# Altium PCB RFID.PCBDOC
Units mm, origin at the board's own origin, x right, y up, seen from the top; angles counter-clockwise.
Board outline 78.02 x 56.38 mm, 2 copper layers (Top Layer, Bottom Layer); 43 components, 46 nets, 207 pads, 109 vias.
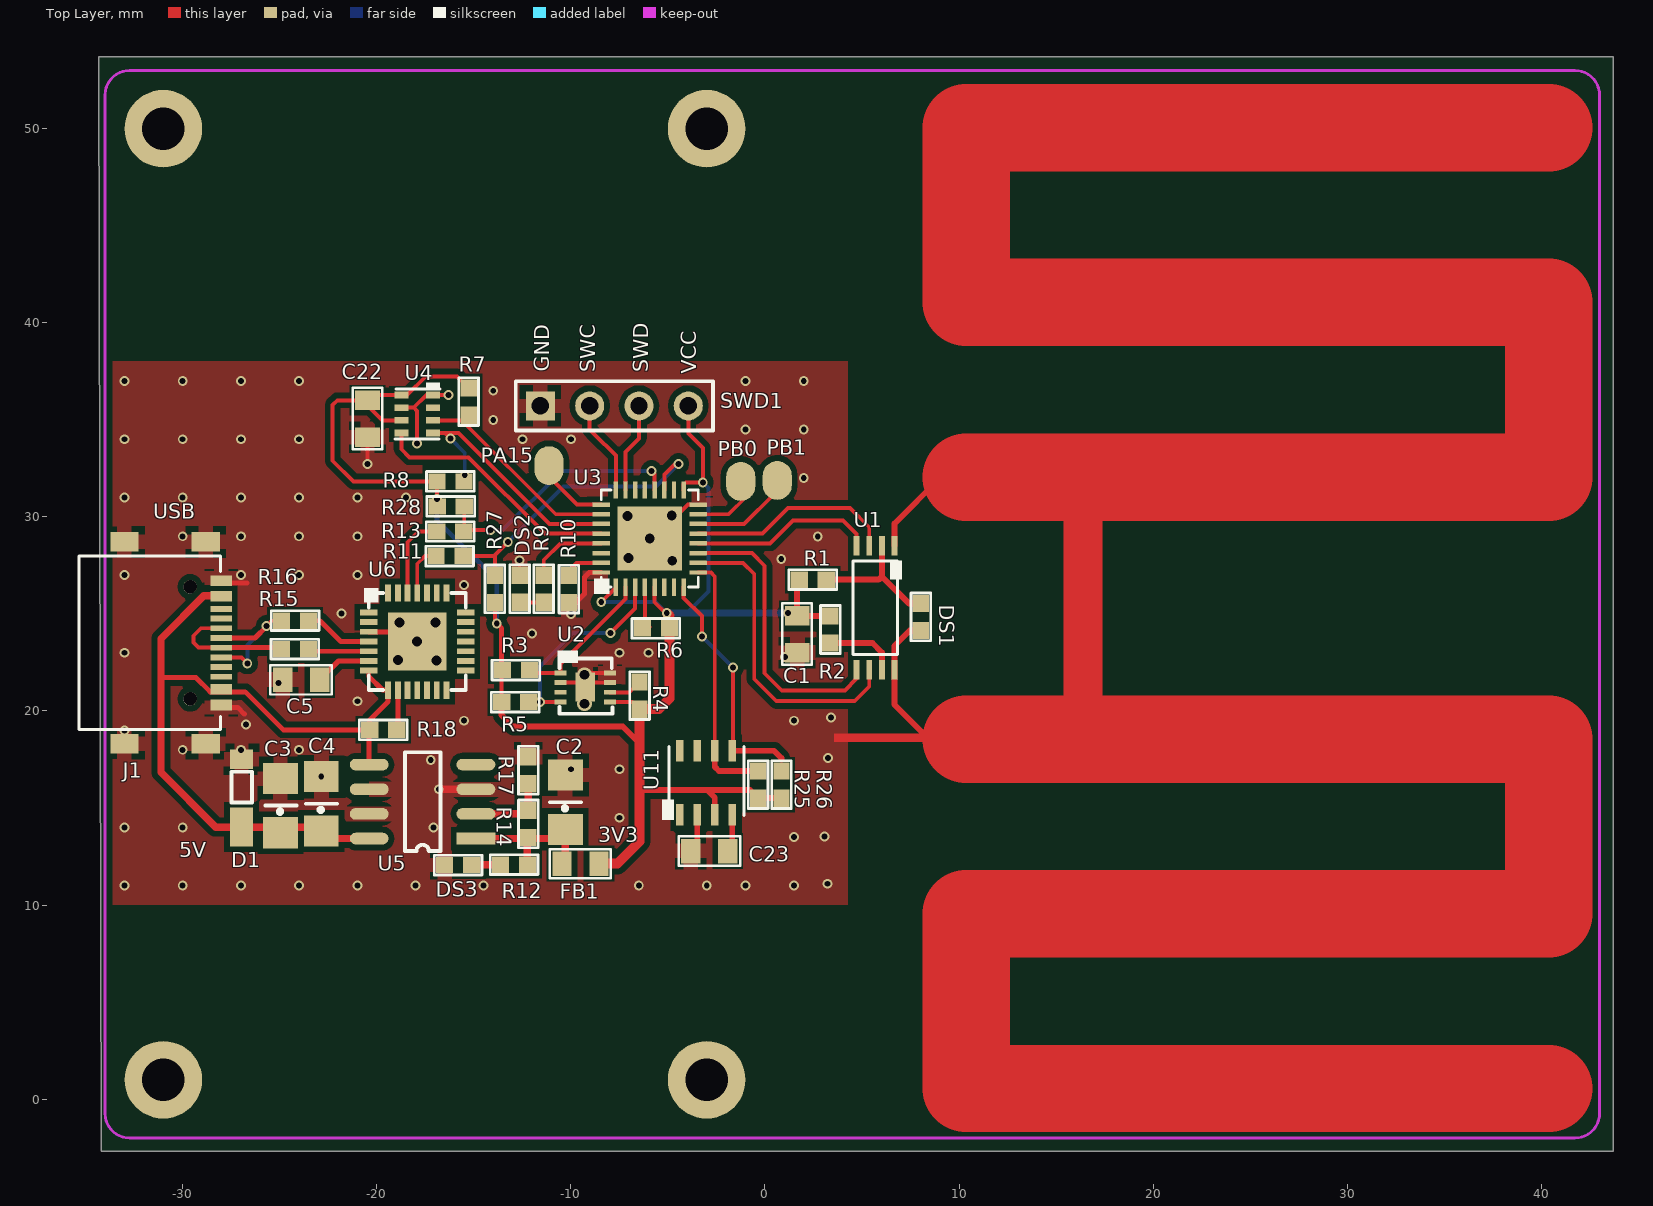
[diagram p0: Top Layer view]
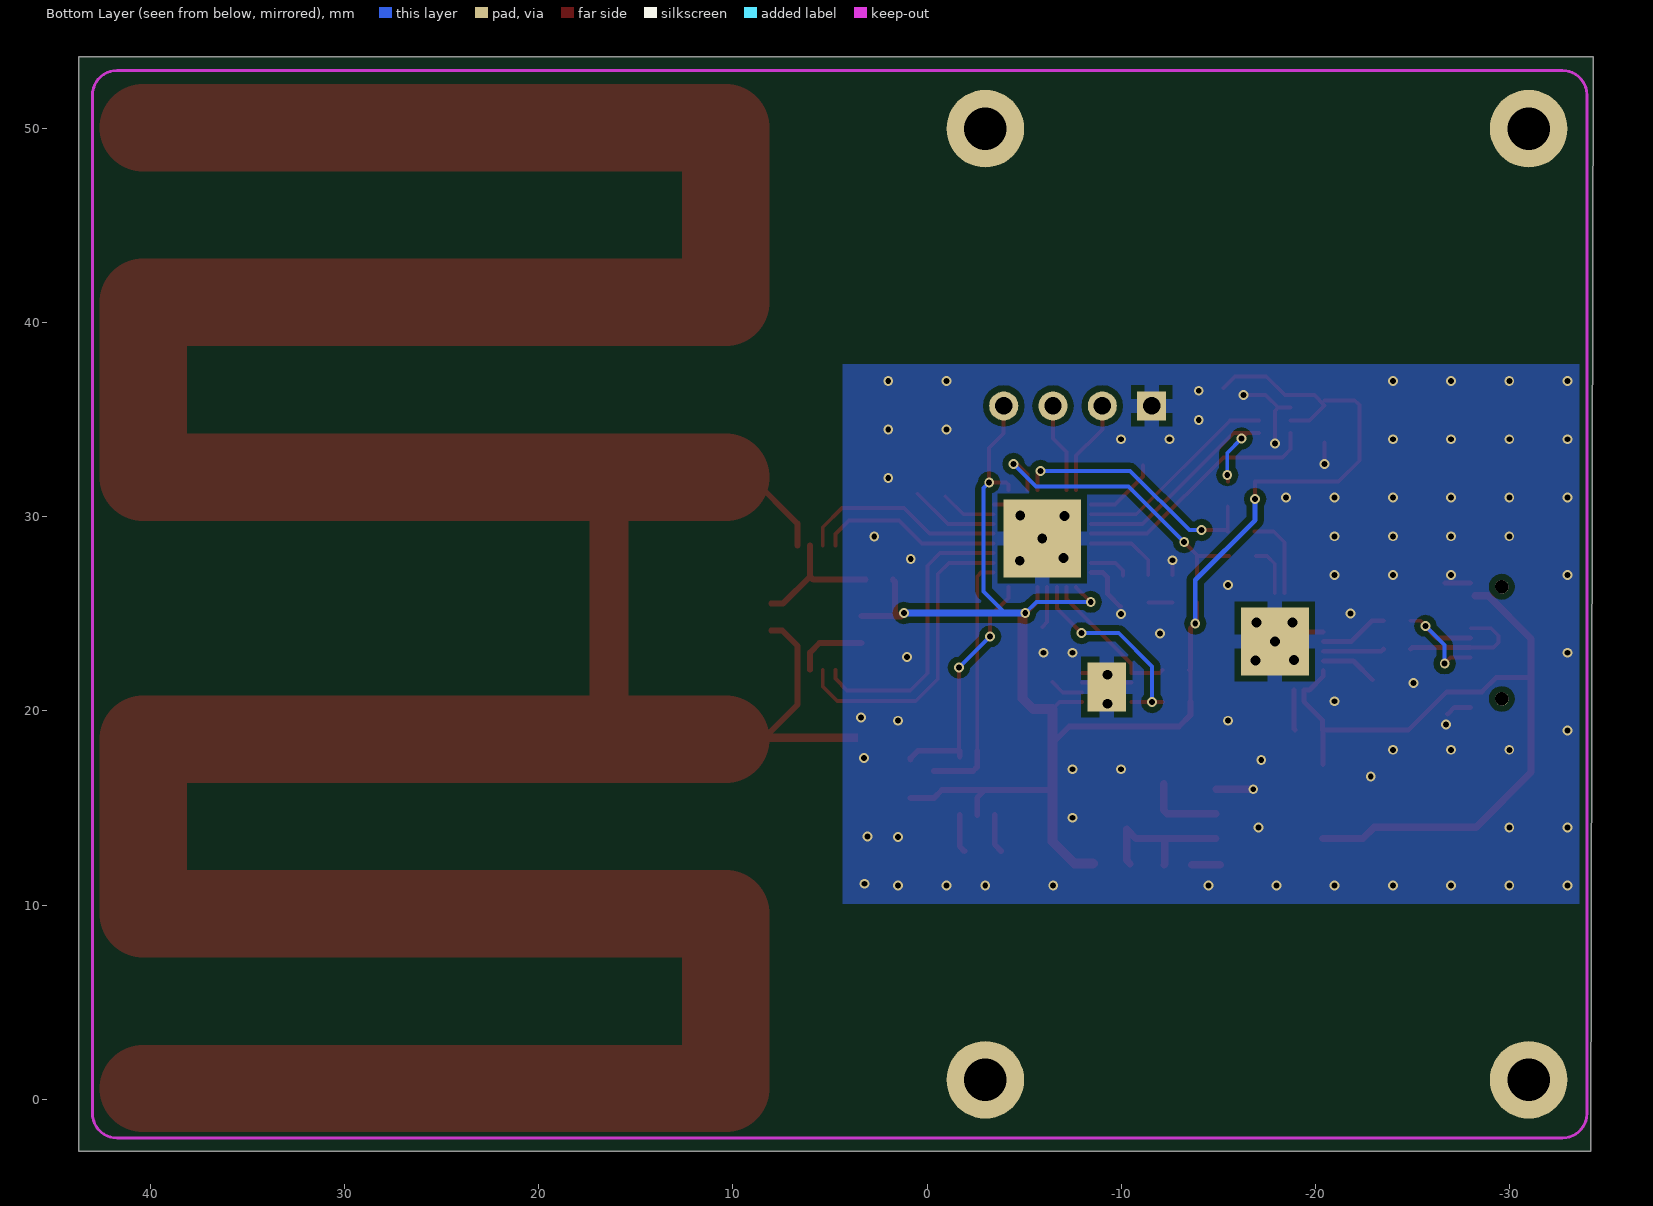
[diagram p1: Bottom Layer view, seen from below]

## Layer stack, top to bottom
Top Layer: signal copper 0.0356
Dielectric: dielectric 0.32, FR-4, Dk 4.8
Bottom Layer: signal copper 0.0356

## Board outline
-34.32,53.701 43.699,53.701 43.699,-2.676 -34.187,-2.676

## Design rules (kind name [scope] priority, off if disabled: settings)
Clearance [All] p1: gap=0.178
ComponentClearance [All] p1: gap=0.254 collisioncheckmode=0
PolygonConnect [All] p1: connectstyle=Relief reliefconductorwidth=0.762 reliefentries=4 polygonreliefangle="90 Angle"
RoutingVias [All] p1: holewidth=0.305 width=0.508 viastyle="Through Hole" minholewidth=0.305 minwidth=0.508 maxholewidth=25.4 maxwidth=25.4
SolderMaskExpansion [All] p1: expansion=0.102
TestPointUsage [All] p1: valid=0 allowmultiple=FALSE
Testpoint [All] p1: side=15 testpointundercomponent=TRUE minsize=1.016 maxsize=2.54 preferedsize=1.524 minholesize=0 maxholesize=1.016 preferedholesize=0.813 testpointgrid=0.025 style=1023 order=-539222988
Width [All] p1: maxlimit=25.4 minlimit=0.203 preferedwidth=0.254 toplayer_prefwidth=0.508 bottomlayer_prefwidth=0.203 minimp=50.000000 maximp=50.000000 favimp=50.000000
17 further rules are at their usual default settings.

## Components (designator, comment, footprint, x,y, rotation, side; value= is the part's Value field where it differs from the comment)
C1 "0.1uF" 0805 1.657,22.994 r90 top
C2 "10uF" 1206 -10.282,15.301 r90 top
C3 "10uF" 1206 -24.958,15.126 r90 top
C4 "10uF" 1206 -22.862,15.219 r90 top
C5 "1uF" 0805 -22.943,21.609 r180 top
C22 "0.1uF" 0805 -20.479,34.099 r90 top
C23 "0.1uF" 0805 -3.826,12.781 r0 top
D1 "NC" DFLS240L -26.965,17.514 r270 top
DS1 "LED" 0603 8.028,24.831 r270 top
DS2 "LED" 0603 -12.64,26.308 r90 top
DS3 "LED" 0603 -15.822,12.063 r180 top
FB1 "Inductor" 0805 -8.553,12.136 r180 top
J1 "USB_TYPEC" USB_TYPEC_16 -28.014,26.837 r270 top
R1 "0" 0603 2.473,26.768 r0 top
R2 "0" 0603 3.372,24.185 r270 top
R3 "2K" 0603 -12.82,22.109 r0 top
R4 "2K" 0603 -6.46,20.781 r270 top
R5 "2K" 0603 -12.854,20.461 r0 top
R6 "10K" 0603 -5.629,24.257 r180 top
R7 "2K" 0603 -15.262,35.927 r270 top
R8 "2K" 0603 -16.192,31.826 r0 top
R9 "2K" 0603 -11.399,26.309 r90 top
R10 "0" 0603 -10.107,26.296 r90 top
R11 "10" 0603 -16.262,27.98 r180 top
R12 "2K" 0603 -12.913,12.081 r0 top
R13 "10" 0603 -16.229,29.249 r180 top
R14 "10K" 0603 -12.187,14.174 r270 top
R15 "10" 0603 -24.205,23.189 r0 top
R16 "10" 0603 -24.197,24.652 r0 top
R17 "3.1K" 0603 -12.187,16.931 r270 top
R18 "10K" 0603 -19.654,19.03 r0 top
R25 "10k" 0603 -0.346,16.194 r270 top
R26 "10k" 0603 0.852,16.194 r270 top
R27 "10k" 0603 -13.912,26.306 r90 top
R28 "10k" 0603 -16.178,30.543 r0 top
SWD1 "Header 4" HDR1X4 -11.57,35.718 r0 top
U1 "EM4325" EM4325 6.674,22.123 r270 top
U2 "SHT30_DIS" SHT30 -10.536,21.974 r0 top
U3 "STM32L432KBU6" STM32L432KBU6 -8.436,26.385 r90 top
U4 "SPL06-001" SPL06-001 -18.728,36.275 r0 top
U5 "LT1963" AT24C64 -14.89,13.428 r180 top
U6 "CP2102" CP2102 -17.908,23.563 r0 top
U11 "WF183DE-15BAR" WF183D -4.387,17.951 r90 top

## Footprints (in the part's own frame and the unit in brackets; to place one, negate y for a bottom-side part, rotate by r counter-clockwise, add the part's x,y. Pads: shape width x height; smd on the part's side, far side on the other; paste and mask are expansions set on the pad)
0603 [mil]
  rect 35x33 smd: 1(-28,-0.1) 2(27,-0.1)
  silkscreen extent -49,-20 48,20
0805 [mm]
  rect 1x1.27 smd: 1(0,0) 2(1.905,0)
  silkscreen extent -0.62,-0.75 2.55,0.76
1206 [mm]
  rect 1.6x1.8 smd: 1(-1.4,0) 2(1.4,0)
  silkscreen extent -0.4,-0.81 0,0.79
AT24C64 [mm]
  rect 2x0.6 smd: 1(0,0)
  oval 2x0.6 smd: 2(0,-1.27) 3(0,-2.54) 4(0,-3.81) 5(5.5,-3.81) 6(5.5,-2.54) 7(5.5,-1.27) 8(5.5,0)
  silkscreen extent 1.84,-4.44 3.66,0.64
CP2102 [mm]
  rect 3.5x3.5 smd far side: 0(-0.012,0.013)
  rect 3x3 smd: 0(-0.006,0.016)
  rect 0.9x0.3 smd: 1(-2.506,1.516) 2(-2.506,1.016) 3(-2.506,0.516) 4(-2.506,0.016) 5(-2.506,-0.484) 6(-2.506,-0.984) 7(-2.506,-1.484) 15(2.494,-1.484) 16(2.494,-0.984) 17(2.494,-0.484) 18(2.494,0.016) 19(2.494,0.516) 20(2.494,1.016) 21(2.494,1.516)
  rect 0.3x0.9 smd: 8(-1.506,-2.484) 9(-1.006,-2.484) 10(-0.506,-2.484) 11(-0.006,-2.484) 12(0.494,-2.484) 13(0.994,-2.484) 14(1.494,-2.484) 22(1.494,2.516) 23(0.994,2.516) 24(0.494,2.516) 25(-0.006,2.516) 26(-0.506,2.516) 27(-1.006,2.516) 28(-1.506,2.516)
  silkscreen extent -2.76,-2.48 2.49,2.77
DFLS240L [mm]
  rect 1x1.2 smd: 1(-0.003,-0.003)
  rect 2x1.2 smd: 2(3.497,-0.003)
  silkscreen extent 0.64,-0.53 2.24,0.54
EM4325 [mm]
  rect 1x0.3 smd: 1(-6.4,0) 2(-6.4,-0.65) 3(-6.4,-1.3) 4(-6.4,-1.95) 5(0,-1.95) 6(0,-1.3) 7(0,-0.65) 8(0,0)
  silkscreen extent -5.64,-2.13 -0.79,0.38
HDR1X4 [mm]
  rect 1.5x1.5 hole 0.9: 1(0,0)
  round 1.5 hole 0.9: 2(2.54,0) 3(5.08,0) 4(7.62,0)
  silkscreen extent -1.27,-1.27 8.89,1.27
SHT30 [mm]
  rect 0.6x0.25 smd: 1(0.002,-0.012) 2(0.002,-0.512) 3(0.002,-1.012) 4(0.002,-1.512) 5(2.552,-1.512) 6(2.552,-1.012) 7(2.552,-0.512) 8(2.552,-0.012)
  rect 1x1.5 smd: 9(1.275,-0.738)
  rect 2x2.5 smd far side: 9(1.275,-0.738)
  silkscreen extent -0.16,-2.12 2.67,1.14
SPL06-001 [mm]
  rect 0.7x0.35 smd: 1(1.625,0) 2(1.625,-0.65) 3(1.625,-1.3) 4(1.625,-1.95) 5(0,-1.95) 6(0,-1.3) 7(0,-0.65) 8(0,0)
  silkscreen extent -0.33,-2.26 1.98,0.64
STM32L432KBU6 [mm]
  rect 0.9x0.23 smd: 1(0,-0.75) 2(0,-1.25) 3(0,-1.75) 4(0,-2.25) 5(0,-2.75) 6(0,-3.25) 7(0,-3.75) 8(0,-4.25) 17(5,-4.25) 18(5,-3.75) 19(5,-3.25) 20(5,-2.75) 21(5,-2.25) 22(5,-1.75) 23(5,-1.25) 24(5,-0.75)
  rect 0.23x0.9 smd: 9(0.75,-5) 10(1.25,-5) 11(1.75,-5) 12(2.25,-5) 13(2.75,-5) 14(3.25,-5) 15(3.75,-5) 16(4.25,-5) 25(4.25,0) 26(3.75,0) 27(3.25,0) 28(2.75,0) 29(2.25,0) 30(1.75,0) 31(1.25,0) 32(0.75,0)
  rect 3.3x3.3 smd: 33(2.5,-2.5)
  rect 4x4 smd far side: 33(2.5,-2.5)
  silkscreen extent -0.36,-5 5,0.38
USB_TYPEC_16 [mm]
  round 0.7 hole 0.7: 1(0.435,-1.6) 2(6.215,-1.6)
  rect 1x1.45 smd: 3(-1.875,-0.8) 4(8.525,-0.8) 5(-1.875,-4.98) 6(8.525,-4.98)
  rect 0.3x1.1 smd: A1(0,0) A4(0.8,0) A5(2.075,0) A6(3.075,0) A7(3.575,0) A8(4.575,0) A9(5.85,0) A12(6.65,0) B1(6.4,0) B4(5.6,0) B5(5.075,0) B6(4.075,0) B7(2.575,0) B8(1.575,0) B9(1.05,0) B12(0.25,0)
  silkscreen extent -1.15,-7.33 7.8,-0.03
WF183D [mm]
  rect 1.1x0.4 smd: 1(-3.3,0) 2(-3.3,-0.9) 3(-3.3,-1.8) 4(-3.3,-2.7) 5(0,-2.7) 6(0,-1.8) 7(0,-0.9) 8(0,0)
  silkscreen extent -3.56,-3.3 0.23,0.91

## Part data
C1 C22 C23: library part Cap, "Capacitor"
C2 C3 C4 C5: library part "Cap Pol1", "Polarized Capacitor (Radial)"
D1: library part Diode, "Default Diode"
DS1 DS2 DS3: "Typical BLUE SiC LED"
R1 R2 R3 R4 R5 R6 R7 R8 R9 R10 R11 R12 R13 R14 R15 R16 R17 R25 R26 R27 R28: library part Res2, "Resistor"
R18: library part Res, "Resistor"
SWD1: "Header, 4-Pin"
U2: library part SHT30
U5: library part LT1763
U11: library part WF183D

## Free pads (board coordinates)
  oval 1.5x2 smd: 0(-11.125,32.639) 0(-1.245,31.826) 1(0.635,31.877)
  round 4 hole 2.2: 2(-31,1) 2(-31,50) 2(-3,1) 2(-3,50)

## Via types
v1: diameter 0.508, hole 0.305, Top Layer to Bottom Layer, 97 vias
v2: diameter 0.762, hole 0.508, Top Layer to Bottom Layer, 12 vias

## Nets (pads, with @x,y where several pads share a name; then routed paths per layer and width w, separated by ;. In a path a pad name is that pad's centre, name@x,y a point inside that pad or via, vN(x,y) a via of type N, cw(c..) or ccw(c..) an arc to the next point about the centre after c; other vN are vias at no path point)
ANT+: U1.1 | length 35.8
  Top Layer w0.305: U1.1 6.674,29.652 9.073,32.051 10.378,32.051
  Top Layer w4.5: 10.378,32.051 40.378,32.051
CS: U1.6 U3.10 | length 16.1
  Top Layer w0.203: U3.10 -1.125,27.635 -0.552,27.062 -0.552,21.649 0.582,20.515 4.626,20.515 5.374,21.262 U1.6
GND: C1.1 C2.2 C3.2 C4.2 C5.2 C22.1 C23.1 D1.1 DS1.2 DS2.2 DS3.2 J1.3 J1.4 J1.5 J1.6 J1.A1 J1.A12 J1.B1 J1.B12 R10.1 R17.1 SWD1.1 U1.8 U2.2 U2.7 U2.8 U2.9 U3.16 U3.32 U3.33 U4.1 U4.7 U5.3 U5.6 U5.7 U6.0 U6.3 U11.2 | length 63
  Top Layer w0.203: v1(-20.485,32.728) C22.1@-20.485,33.839 ; U4.7 -18.096,35.625 ; v1(-17.932,33.782) -17.932,35.462 -18.096,35.625 ; v1(-16.311,36.275) -17.446,36.275 -18.096,35.625 ; DS2.2 v1(-12.638,27.767) ; U2.2 U2.7 ; U2.9@-9.261,21.235 -9.487,21.461 -8.987,21.961 U2.8 ; v2(-4.801,30.074) -4.521,30.074 -3.96,30.635 U3.16
  Top Layer w0.254: J1.A12 -27.172,20.187 -26.822,19.837 ; J1.B12 -26.677,26.587 ; U6.3 -19.305,24.078 v2(-18.821,24.562) ; R10.1@-9.982,25.375 -9.957,25.375 -9.296,26.035 -9.296,26.899 -9.06,27.135 U3.32
  Top Layer w0.305: C23.1 -3.487,13.12 U11.2 ; DS1.2 7.462,24.146 6.674,23.358 6.674,20.324 8.447,18.551 10.378,18.551
  Top Layer w0.381: v1(-16.806,15.968) U5.3
  Top Layer w4.5: 10.378,18.551 40.378,18.551
  other v1: -33,11 -30,11 -27,11 -24,11 -21,11 -18,11 -14.5,11 -6.5,11 -3,11 -1,11 1.5,11 3.226,11.1 1.5,13.5 3.073,13.538 -33,14 -30,14 -17.069,13.995 -7.5,14.5 -22.862,16.619 -10,17 -7.5,17 -17.221,17.475 3.251,17.577 -30,18 -27,18 -24,18 -33,19 -26.746,19.304 -15.5,19.5 1.5,19.5 3.404,19.66 -21,20.5 -25.07,21.438 1.041,22.784 -33,23 -7.5,23 -6,23 -12,24 -10,25 -21.819,25.019 -15.5,26.5 -33,27 -27,27 -24,27 -21,27 0.838,27.838 2.718,28.981 -30,29 -27,29 -24,29 -21,29 -33,31 -30,31 -27,31 -24,31 -21,31 -18.5,31 2,32 -33,34 -30,34 -27,34 -24,34 -12.5,34 -10,34 -1,34.5 2,34.5 -14,35 -14,36.5 -33,37 -30,37 -27,37 -24,37 -1,37 2,37
  other v2: -9.296,20.371 -9.296,21.869 -16.916,22.606 -18.898,22.631 -17.92,23.575 -16.967,24.562 -4.775,27.737 -7.036,27.889 -5.936,28.885 -7.087,30.048
MISO: U1.4 U3.12 | length 9.5
  Top Layer w0.203: U3.12 0.264,28.635 1.435,29.806 4.031,29.806 4.724,29.112 U1.4
MOSI: U1.3 U3.13 | length 10.7
  Top Layer w0.203: U3.13 -0.128,29.135 1.193,30.456 4.383,30.456 5.374,29.466 U1.3
NetC2_1: C2.1 FB1.2 R12.2 R14.2 U5.1 | length 8
  Top Layer w0.381: U5.1 -10.755,13.428 C2.1 -10.282,12.311 FB1.2 ; R14.2@-12.243,13.428 -12.243,12.094 R12.2
NetC5_1: C5.1 U6.6 | length 2.9
  Top Layer w0.254: C5.1 -21.973,22.578 U6.6
NetC23_2: C23.2 U11.4 | length 2
  Top Layer w0.305: C23.2 -1.687,13.015 U11.4
NetDS1_1: DS1.1 R1.2 U1.2 | length 7.1
  Top Layer w0.305: R1.2 5.859,26.766 6.024,26.931 ; U1.2 6.024,26.931 ; DS1.1 7.412,25.543 6.024,26.931
NetDS2_1: DS2.1 R9.1 | length 1.2
  Top Layer w0.203: DS2.1 -11.398,25.596 R9.1
NetDS3_1: DS3.1 R12.1 | length 1.5
  Top Layer w0.381: DS3.1 -15.097,12.079 R12.1
NetJ1_A6: J1.A6 J1.B6 R16.1 | length 7.3
  Top Layer w0.203: J1.B6 -26.979,22.762 v1(-26.67,22.454) ; v1(-25.679,24.384) -25.414,24.649 R16.1
  Top Layer w0.254: J1.A6 -26.276,23.762 v1@-25.667,24.371
  Bottom Layer w0.203: v1(-26.67,22.454) -26.67,23.393 v1(-25.679,24.384)
NetJ1_A7: J1.A7 J1.B7 R15.1 | length 6.6
  Top Layer w0.203: J1.A7 -29.18,23.262 -29.439,23.52 -29.439,23.876 -29.052,24.262 J1.B7
  Top Layer w0.254: J1.A7 -24.991,23.262 R15.1
NetR2_2: R2.2 U1.7 | length 3.7
  Top Layer w0.305: R2.2 5.536,23.499 6.024,23.012 U1.7
NetR4_1: R4.1 U2.6 | length 1.7
  Top Layer w0.203: U2.6 -6.993,20.961 R4.1
NetR6_2: R6.2 U3.4 | length 2.2
  Top Layer w0.203: U3.4 -6.186,24.577 R6.2@-5.94,24.331
NetR9_2: R9.2 U3.29 | length 4.1
  Top Layer w0.203: R9.2 -11.396,27.78 -10.542,28.635 U3.29
NetR10_2: R10.2 U3.31 | length 2.1
  Top Layer w0.203: R10.2 -10.105,27.238 -9.707,27.635 U3.31
NetR11_2: R11.2 U6.25 | length 2.6
  Top Layer w0.203: U6.25 -17.914,27.587 -17.518,27.983 R11.2
NetR13_2: R13.2 U6.26 | length 4.4
  Top Layer w0.203: U6.26 -18.414,28.695 -17.864,29.244 R13.2@-16.878,29.244
NetR14_1: R14.1 R17.2 U5.2 | length 4.1
  Top Layer w0.381: U5.2 -12.376,14.698 R14.1 R17.2
NetR15_2: R15.2 U6.5 | length 3.1
  Top Layer w0.254: R15.2 -23.411,23.078 U6.5
NetR16_2: R16.2 U6.4 | length 3.5
  Top Layer w0.254: R16.2 -22.922,24.649 -21.851,23.578 U6.4
NetR18_2: R18.2 U6.9 | length 2.1
  Top Layer w0.254: R18.2 -18.914,19.082 U6.9
NetSWD1_2: SWD1.2 U3.24 | length 5.2
  Top Layer w0.203: SWD1.2 -9.03,34.507 -8.615,34.091 ; -8.8,34.277 -7.686,33.162 U3.24
NetSWD1_3: SWD1.3 U3.23 | length 4.6
  Top Layer w0.203: U3.23 -7.186,33.351 -6.49,34.047 SWD1.3
PA0: U3.6
PA1: U3.7
PA8: U3.18
PA11: U3.21
PA12: U3.22
PA15: pad.0@-11.125,32.639 U3.25 | length 3.8
  Top Layer w0.203: pad.0@-11.125,32.639 -11.125,32.08 -9.68,30.635 U3.25
PB0: pad.1 U3.14 | length 4.6
  Top Layer w0.203: U3.14 -1.073,29.635 pad.1@0.483,31.191
PB1: pad.0@-1.245,31.826 U3.15 | length 2.9
  Top Layer w0.203: U3.15 -1.869,30.135 pad.0@-0.94,31.064
RX0: R13.1 R28.2 U3.20 | length 13.3
  Top Layer w0.203: R13.1 -15.493,29.277 R28.2 ; R13.1@-15.481,29.244 -15.402,29.323 v1(-14.142,29.323) ; v1(-5.849,32.372) -5.686,32.209 U3.20
  Bottom Layer w0.203: v1(-14.142,29.323) -13.515,29.323 -10.466,32.372 v1(-5.849,32.372)
RX2: R25.1 U3.9 U11.6 | length 13.1
  Top Layer w0.203: U3.9 -2.786,27.135 -2.587,26.936 U11.6
  Top Layer w0.305: U11.6 -2.587,17.122 -2.37,16.906 R25.1
SCK: U1.5 U3.11 | length 15
  Top Layer w0.203: U3.11 -0.678,28.135 -0.025,27.483 -0.025,21.946 0.864,21.057 4.115,21.057 4.724,21.666 U1.5
SCK3: R5.2 U2.4 U3.3 | length 10.7
  Top Layer w0.203: R5.2 -10.537,20.458 U2.4 ; v1(-7.966,24.01) -6.686,25.29 U3.3
  Bottom Layer w0.203: v1(-11.599,20.458) -11.599,22.288 -9.877,24.01 v1(-7.966,24.01)
SCLK2: R8.2 U3.27 U4.4 | length 13.6
  Top Layer w0.203: U4.4 -15.79,34.325 -11.1,29.635 U3.27 ; -16.495,34.325 v1(-16.205,34.036) ; R8.2 -15.506,32.119 v1(-15.469,32.156)
  Bottom Layer w0.203: v1(-16.205,34.036) -15.469,33.299 v1(-15.469,32.156)
SDA2: R7.2 U3.26 U4.3 | length 10.7
  Top Layer w0.203: U4.3 -15.621,34.975 -10.78,30.135 U3.26
SDA3: R3.2 U2.1 U3.2 | length 7.5
  Top Layer w0.203: R3.2 -11.989,21.961 U2.1 -10.534,22.42 -7.186,25.768 U3.2
SDO: U3.28 U4.5 | length 12.9
  Top Layer w0.203: U4.5 -18.728,33.485 -18.313,33.071 -15.265,33.071 -11.33,29.135 U3.28
TX0: R11.1 R27.2 U3.19 | length 15.9
  Top Layer w0.203: R11.1 -13.968,27.983 v1(-13.249,28.701) ; R27.2 -13.909,28.041 ; U3.19 -5.186,32.177 -4.634,32.73 v1(-4.461,32.73)
  Bottom Layer w0.203: v1(-13.249,28.701) -10.374,31.576 -5.615,31.576 v1(-4.461,32.73)
TX2: R26.1 U3.8 U11.5 | length 12.6
  Top Layer w0.203: U3.8 -4.186,25.832 -3.251,24.897 v1(-3.251,23.842) ; U11.5 -1.643,17.995 v1(-1.643,22.234)
  Top Layer w0.305: U11.5@-1.687,17.65 U11.5 0.469,17.951 0.849,17.571 0.849,17.492
  Bottom Layer w0.203: v1(-3.251,23.842) v1(-1.643,22.234)
VBUS: C3.1 C4.1 D1.2 J1.A4 J1.A9 J1.B4 J1.B9 R18.1 U5.5 U5.8 U6.7 U6.8 | length 40.5
  Top Layer w0.254: -31.115,21.717 -29.312,21.717 -28.582,20.987 -26.778,20.987 -24.819,19.028 R18.1 ; U6.7 -20.414,21.785 -19.707,21.078 U6.8 -19.414,20.49 -20.365,19.539 R18.1 ; U5.5 -20.39,19.003 R18.1
  Top Layer w0.381: J1.A4@-28.245,25.933 -28.905,25.933 -31.115,23.724 -31.115,16.84 -28.291,14.017 -23.034,14.017 -22.445,13.428 U5.8
VCC3V3: C1.2 C22.2 FB1.1 R1.1 R2.1 R3.1 R4.2 R5.1 R6.1 R7.1 R8.1 R25.2 R26.2 R27.1 R28.1 SWD1.4 U2.5 U3.1 U3.5 U3.17 U4.6 U4.8 U11.3 | length 96.8
  Top Layer w0.203: C22.2 -22.035,36.004 -22.276,35.763 -22.276,32.893 -21.207,31.824 R8.1 v1(-16.903,30.925) ; U4.6 -19.716,34.975 -20.485,35.744 -19.954,36.275 -18.436,36.275 -17.475,37.236 -15.863,37.236 R7.1 ; R28.1@-16.903,30.554 R28.1 ; R27.1 -13.909,24.686 v1@-13.776,24.552 ; R5.1 R3.1@-13.565,22.106 ; v1(-8.434,25.621) -7.686,26.369 U3.1 ; U2.5 -6.829,20.461 R4.2 ; U3.5 -5.686,25.602 v1@-5.098,25.014 ; U3.17 -4.186,31.668 -4.076,31.778 v1(-3.202,31.778) -3.202,33.555 -3.95,34.303 SWD1.4
  Top Layer w0.254: v1(-13.818,24.51) -13.565,24.257 -13.565,22.14 R3.1
  Top Layer w0.305: R5.1 -13.565,19.788 -12.979,19.202 -7.326,19.202 -6.462,18.339 ; -6.462,15.928 -0.768,15.928 R25.2 R26.2 ; -2.969,15.928 -2.587,15.546 U11.3 ; R1.1 1.657,26.661 C1.2 1.66,24.896 R2.1
  Top Layer w0.381: v1(1.188,25.05) 1.339,24.899 C1.2
  Top Layer w0.508: FB1.1 -7.6,12.136 -6.462,13.273 R4.2 -5.457,20.095 -4.918,20.635 -4.918,24.907 v1(-5.061,25.05)
  Bottom Layer w0.203: v1(-8.434,25.621) -5.632,25.621 v1(-5.061,25.05) ; -4.023,25.05 -2.911,26.162 -2.911,31.486 v1(-3.202,31.778)
  Bottom Layer w0.254: v1(-16.903,30.925) -16.903,29.832 -13.818,26.746 v1(-13.818,24.51)
  Bottom Layer w0.381: v1(-5.061,25.05) v1(1.188,25.05)
pads on no net: J1.1 J1.2 J1.A5 J1.A8 J1.B5 J1.B8 U2.3 U3.30 U4.2 U5.4 U6.1 U6.2 U6.10 U6.11 U6.12 U6.13 U6.14 U6.15 U6.16 U6.17 U6.18 U6.19 U6.20 U6.21 U6.22 U6.23 U6.24 U6.27 U6.28 U11.1 U11.7 U11.8
copper on no net: | length 169.5
  Top Layer w2: 16.378,18.551 16.378,32.051
  Top Layer w4.5: 40.378,0.551 10.378,0.551 10.378,9.551 40.378,9.551 40.378,18.551 ; 40.378,32.051 40.378,41.051 10.378,41.051 10.378,50.051 40.378,50.051

## Polygon pours and split planes (outlines as drawn)
GND on Top Layer (solid, remove dead copper): -34.493,38.024 4.267,38.024 4.267,10.008 -35.128,10.008
GND on Bottom Layer (solid, remove dead copper): -34.569,37.871 4.343,37.871 4.343,10.058 -34.747,10.058

## Keep-outs
Keep-Out Layer:
  circle w0.15: c-28,53 r0
  lines w0.15: -34,-0.73 ccw(c-32.73,-0.73) -32.73,-2 41.73,-2 ccw(c41.73,-0.73) 43,-0.73 43,51.73 ccw(c41.73,51.73) 41.73,53 -28,53 -32.73,53 ccw(c-32.73,51.73) -34,51.73 -34,-0.73

## Other copper
Top Layer:
  rectangle net GND: 3.556,18.39 8.23,18.844

## Silkscreen, mask and mechanical layers (free items; w line width, h text height)
Top Overlay:
  text "GND" at -11.125,37.465 h0.76 r90
  text "SWC" at -8.738,37.44 h0.76 r90
  text "SWD" at -6.02,37.44 h0.76 r90
  text "VCC" at -3.531,37.363 h0.76 r90
  text "PB1" at 0.102,33.198 h0.76
  text "PB0" at -2.438,33.122 h0.76
  text "PA15" at -14.63,32.791 h0.76
  text "USB" at -31.521,29.896 h0.76
  text "3V3" at -8.585,13.233 h0.76
  text "5V" at -30.175,12.471 h0.76